# Altium PCB door_connect_2.0.PcbDoc
Units mm, origin at the board's own origin, x right, y up, seen from the top; angles counter-clockwise.
Board outline 40 x 48 mm, 2 copper layers (Top Layer, Bottom Layer); 2 components, 8 nets, 36 pads, 0 vias.
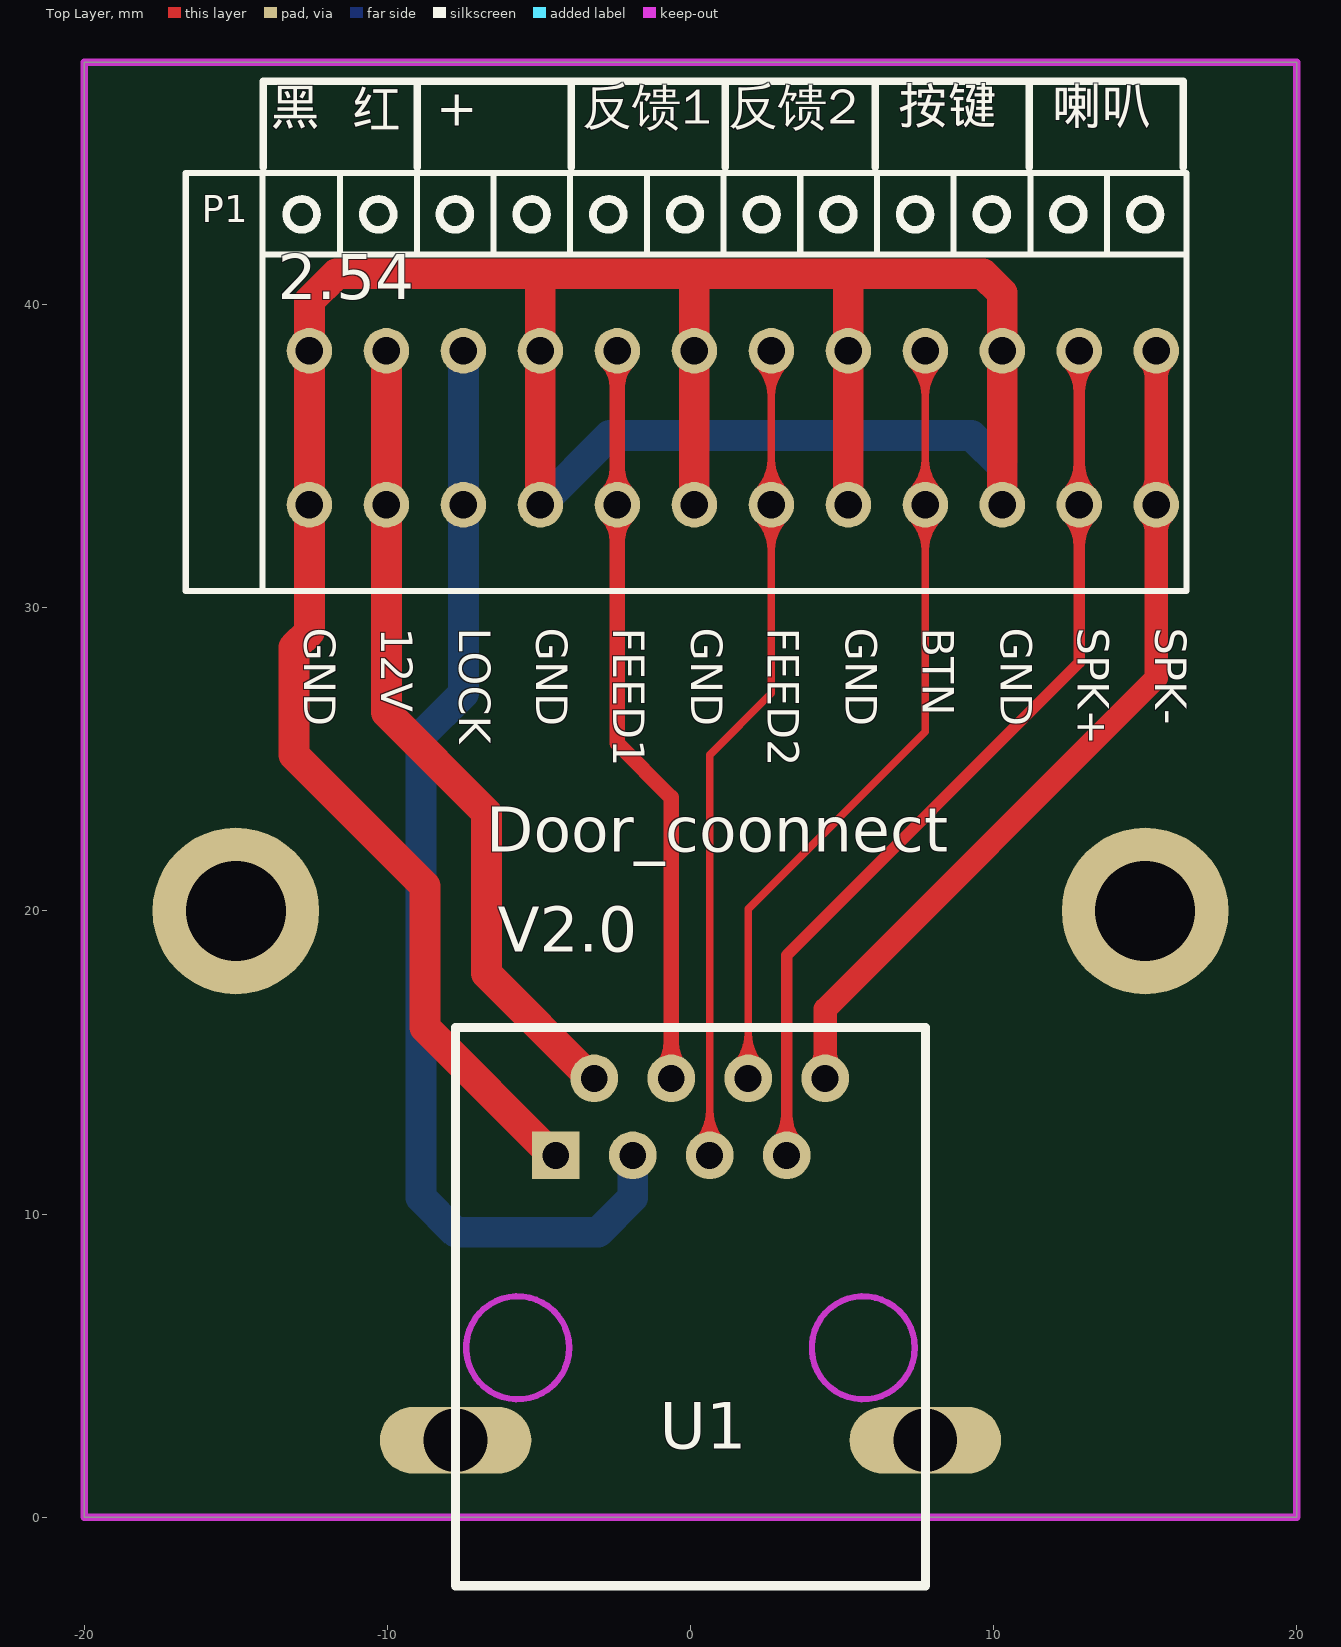
[diagram p0: Top Layer view]
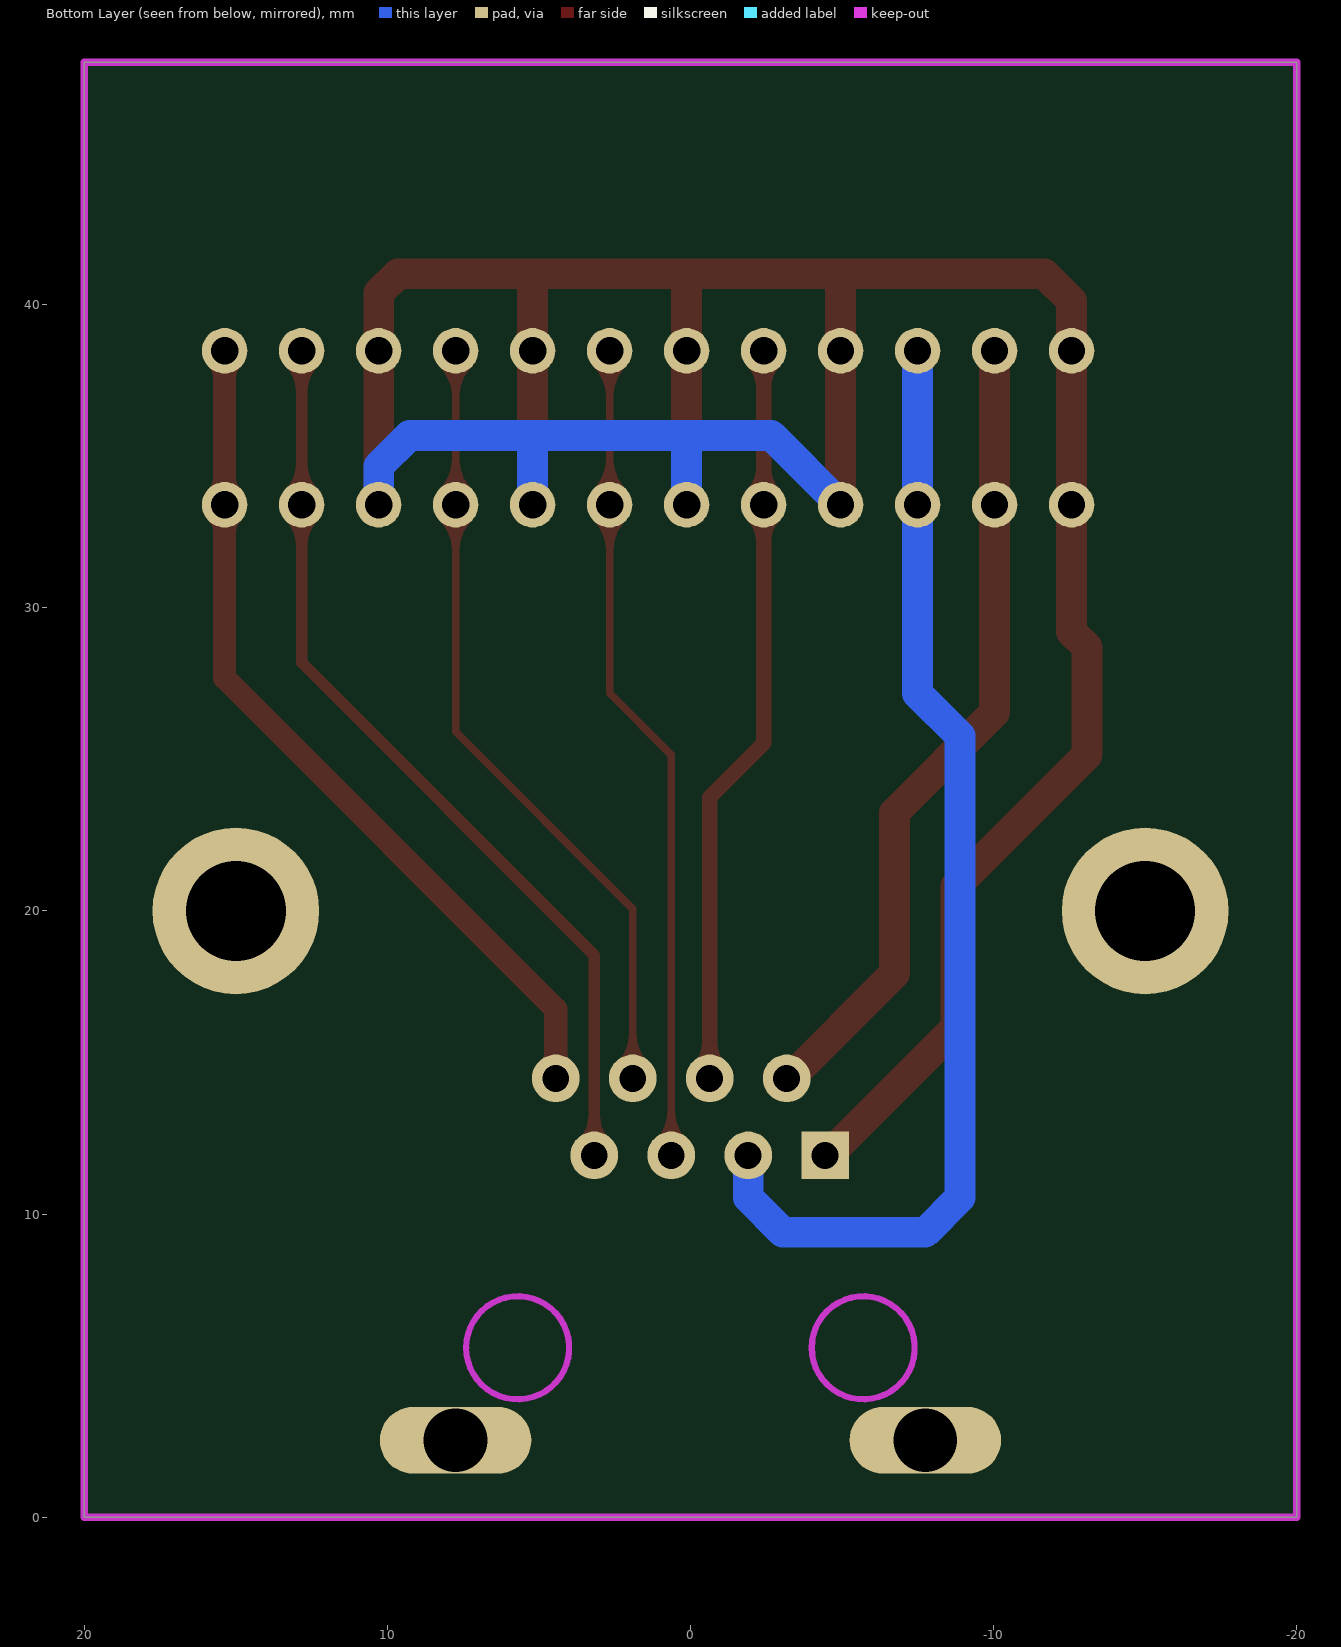
[diagram p1: Bottom Layer view, seen from below]

## Layer stack, top to bottom
Top Layer: signal copper 0.0356
Dielectric: dielectric 0.32, FR-4, Dk 4.8
Bottom Layer: signal copper 0.0356

## Board outline
-20,0 20,0 20,48 -20,48

## Design rules (kind name [scope] priority, off if disabled: settings)
Clearance [All] p1: gap=0.178
ComponentClearance [All] p1: gap=0 collisioncheckmode=3 verticalgap=0 showdistances=FALSE
HoleSize [All] p1: absolutevalues=TRUE maxlimit=25.4 minlimit=0.025 maxpercent=80.000 minpercent=20.000
HoleToHoleClearance [All] p1: gap=0.178 allowstackedmicrovias=TRUE
MinimumSolderMaskSliver [All] p1: minsoldermaskwidth=0
PolygonConnect [All] p1: connectstyle=Relief reliefconductorwidth=0.254 reliefentries=4 polygonreliefangle="90 Angle"
RoomDefinition IO [InComponentClass('IO')] p1: confinementstyle=ConfineIn formatcopy=TRUE lockcomponents=FALSE outline -89.808,-58.012 -39.008,-58.012 -39.008,-32.612 -89.808,-32.612
RoutingVias [All] p1: holewidth=0.356 width=0.559 viastyle="Through Hole" minholewidth=0.356 minwidth=0.559 maxholewidth=7.112 maxwidth=12.7
SilkToSilkClearance [All] p1: silktosilkclearance=0
SilkscreenOverComponentPads [All] p1: minsilkscreentomaskgap=0
SolderMaskExpansion [All] p1: expansion=0.102
TestPointUsage [All] p1: valid=0 allowmultiple=FALSE
Testpoint [All] p1: side=15 testpointundercomponent=TRUE minsize=1.016 maxsize=2.54 preferedsize=1.524 minholesize=0 maxholesize=1.016 preferedholesize=0.813 testpointgrid=0.025 style=1023 order=0123456789
Width [All] p1: maxlimit=2.54 minlimit=0.178 preferedwidth=0.178
18 further rules are at their usual default settings.

## Components (designator, comment, footprint, x,y, rotation, side; value= is the part's Value field where it differs from the comment)
P1 "Header 12" KF141R-2.54-12 -12.573,38.481 r0 top
U1 "RJ45-DTE" RJ45 0,5.588 r180 top

## Footprints (in the part's own frame and the unit in brackets; to place one, negate y for a bottom-side part, rotate by r counter-clockwise, add the part's x,y. Pads: shape width x height; smd on the part's side, far side on the other; paste and mask are expansions set on the pad)
KF141R-2.54-12 [mm]
  round 1.5 hole 0.9: 1(0,-5.08) 1(0,0) 2(2.54,-5.08) 2(2.54,0) 3(5.08,-5.08) 3(5.08,0) 4(7.62,-5.08) 4(7.62,0) 5(10.16,-5.08) 5(10.16,0) 6(12.7,-5.08) 6(12.7,0) 7(15.24,-5.08) 7(15.24,0) 8(17.78,-5.08) 8(17.78,0) 9(20.32,-5.08) 9(20.32,0) 10(22.86,-5.08) 10(22.86,0) 11(25.4,-5.08) 11(25.4,0) 12(27.94,-5.08) 12(27.94,0)
  silkscreen extent -4.08,-7.93 28.94,5.87
RJ45 [mil]
  oval 196.85x86.61 hole 82.68: 0(-305.12,120.08) 0(305.12,120.08)
  rect 62x62 hole 35: 1(175,-250)
  round 62 hole 35: 2(125,-350) 3(75,-250) 4(25,-350) 5(-25,-250) 6(-75,-350) 7(-125,-250) 8(-175,-350)
  Keep-Out Layer circle w8: c-224.41,0 r66.93
  Keep-Out Layer circle w8: c224.41,0 r66.93
  silkscreen extent -305,-416 305,309

## Part data
P1: "Header, 12-Pin"

## Free pads (board coordinates)
  round 5.5 hole 3.3: 0(-15,20) 0(15,20)

## Nets (pads, with @x,y where several pads share a name; then routed paths per layer and width w, separated by ;. In a path a pad name is that pad's centre, name@x,y a point inside that pad or via, vN(x,y) a via of type N, cw(c..) or ccw(c..) an arc to the next point about the centre after c; other vN are vias at no path point)
BTN: P1.9 U1.6 | length 41.9
  Top Layer w0.254: U1.6@1.438,14.845 ccw(c0.311,15.972) 1.905,15.972 ccw(c3.499,15.972) U1.6@2.372,14.845 ; U1.6@1.618,14.665 ccw(c0.924,15.359) 1.905,15.359 ccw(c2.886,15.359) U1.6@2.192,14.665 ; U1.6@1.905,14.378 1.905,20.066 7.747,25.908 7.747,33.401 P1.9@7.747,38.481 ; P1.9@7.306,32.96 cw(c6.243,31.897) 7.747,31.897 cw(c9.251,31.897) P1.9@8.188,32.96 ; P1.9@7.306,33.842 ccw(c6.243,34.905) 7.747,34.905 ccw(c9.251,34.905) P1.9@8.188,33.842 ; P1.9@7.306,38.04 cw(c6.243,36.977) 7.747,36.977 cw(c9.251,36.977) P1.9@8.188,38.04 ; P1.9@7.486,33.14 cw(c6.856,32.51) 7.747,32.51 cw(c8.638,32.51) P1.9@8.008,33.14 ; P1.9@7.486,33.662 ccw(c6.856,34.292) 7.747,34.292 ccw(c8.638,34.292) P1.9@8.008,33.662 ; P1.9@7.486,38.22 cw(c6.856,37.59) 7.747,37.59 cw(c8.638,37.59) P1.9@8.008,38.22
D12V: P1.2 U1.2 | length 26.9
  Top Layer w1.016: P1.2@-10.033,38.481 -10.033,33.401 -10.033,26.543 -6.731,23.241 -6.731,17.934 U1.2@-3.175,14.378
FEED1: P1.5 U1.4 | length 32.5
  Top Layer w0.508: P1.5@-2.764,33.05 cw(c-3.61,32.204) -2.413,32.204 cw(c-1.216,32.204) P1.5@-2.062,33.05 ; P1.5@-2.764,33.752 ccw(c-3.61,34.598) -2.413,34.598 ccw(c-1.216,34.598) P1.5@-2.062,33.752 ; P1.5@-2.764,38.13 cw(c-3.61,37.284) -2.413,37.284 cw(c-1.216,37.284) P1.5@-2.062,38.13 ; P1.5@-2.413,38.481 -2.413,33.401 -2.413,25.527 -0.635,23.749 U1.4@-0.635,14.378 ; U1.4@-1.012,14.755 ccw(c-1.923,15.666) -0.635,15.666 ccw(c0.653,15.666) U1.4@-0.258,14.755
FEED2: P1.7 U1.5 | length 42.8
  Top Layer w0.254: U1.5@0.168,12.305 ccw(c-0.959,13.432) 0.635,13.432 ccw(c2.229,13.432) U1.5@1.102,12.305 ; U1.5@0.348,12.125 ccw(c-0.346,12.819) 0.635,12.819 ccw(c1.616,12.819) U1.5@0.922,12.125 ; U1.5@0.635,11.838 0.635,25.146 2.667,27.178 2.667,33.401 P1.7@2.667,38.481 ; P1.7@2.226,32.96 cw(c1.163,31.897) 2.667,31.897 cw(c4.171,31.897) P1.7@3.108,32.96 ; P1.7@2.226,33.842 ccw(c1.163,34.905) 2.667,34.905 ccw(c4.171,34.905) P1.7@3.108,33.842 ; P1.7@2.226,38.04 cw(c1.163,36.977) 2.667,36.977 cw(c4.171,36.977) P1.7@3.108,38.04 ; P1.7@2.406,33.14 cw(c1.776,32.51) 2.667,32.51 cw(c3.558,32.51) P1.7@2.928,33.14 ; P1.7@2.406,33.662 ccw(c1.776,34.292) 2.667,34.292 ccw(c3.558,34.292) P1.7@2.928,33.662 ; P1.7@2.406,38.22 cw(c1.776,37.59) 2.667,37.59 cw(c3.558,37.59) P1.7@2.928,38.22
GND: P1.1 P1.4 P1.6 P1.8 P1.10 U1.1 | length 106.7
  Top Layer w1.016: P1.4@-4.953,33.401 -4.953,38.481 -4.953,40.64 ; U1.1@-4.445,11.838 -8.763,16.156 -8.763,20.828 -13.081,25.146 -13.081,28.702 -12.573,29.21 -12.573,33.401 -12.573,38.481 -12.573,40.132 -11.684,41.021 9.652,41.021 10.287,40.386 10.287,38.481 P1.10@10.287,33.401 ; P1.6@0.127,33.401 0.127,38.481 0.127,40.894 ; P1.8@5.207,33.401 5.207,38.481 5.207,40.894
  Bottom Layer w1.016: P1.4@-4.953,33.401 -2.667,35.687 9.271,35.687 10.287,34.671 P1.10@10.287,33.401 ; P1.6@0.127,33.401 0.127,35.56 ; P1.8@5.207,33.401 5.207,35.306
LOCK_V+: P1.3 U1.3 | length 37.7
  Bottom Layer w1.016: P1.3@-7.493,38.481 -7.493,33.401 -7.493,27.178 -8.89,25.781 -8.89,10.541 -7.747,9.398 -3.048,9.398 -1.905,10.541 U1.3@-1.905,11.838
SPEAKERA: P1.11 U1.7 | length 39.3
  Top Layer w0.381: U1.7@2.753,12.26 ccw(c1.734,13.279) 3.175,13.279 ccw(c4.616,13.279) U1.7@3.597,12.26 ; U1.7@3.175,11.838 3.175,18.542 12.827,28.194 12.827,33.401 P1.11@12.827,38.481 ; P1.11@12.431,33.005 cw(c11.476,32.05) 12.827,32.05 cw(c14.178,32.05) P1.11@13.223,33.005 ; P1.11@12.431,33.797 ccw(c11.476,34.752) 12.827,34.752 ccw(c14.178,34.752) P1.11@13.223,33.797 ; P1.11@12.431,38.085 cw(c11.476,37.13) 12.827,37.13 cw(c14.178,37.13) P1.11@13.223,38.085
SPEAKERB: P1.12 U1.8 | length 34.4
  Top Layer w0.762: U1.8@4.158,14.665 ccw(c3.464,15.359) 4.445,15.359 ccw(c5.426,15.359) U1.8@4.732,14.665 ; U1.8@4.445,14.378 4.445,16.764 15.367,27.686 15.367,33.401 P1.12@15.367,38.481 ; P1.12@15.106,33.14 cw(c14.476,32.51) 15.367,32.51 cw(c16.258,32.51) P1.12@15.628,33.14 ; P1.12@15.106,33.662 ccw(c14.476,34.292) 15.367,34.292 ccw(c16.258,34.292) P1.12@15.628,33.662 ; P1.12@15.106,38.22 cw(c14.476,37.59) 15.367,37.59 cw(c16.258,37.59) P1.12@15.628,38.22
pads on no net: U1.0

## Keep-outs
Keep-Out Layer:
  the board outline again, w0.254

## Silkscreen, mask and mechanical layers (free items; w line width, h text height)
Top Overlay:
  lines w0.254: -14.097,44.54 -14.097,47.371 -9.017,47.371 ; -9.017,44.54 -9.017,47.371 ; -3.937,44.54 -3.937,47.371 ; 1.143,44.54 1.143,47.371 ; 6.096,44.54 6.096,47.371 ; 11.176,44.54 11.176,47.371 ; 16.256,44.54 16.256,47.371 11.176,47.371 ; -9.017,47.371 -3.937,47.371 ; -3.937,47.371 1.143,47.371 ; 1.143,47.371 6.096,47.371 ; 6.096,47.371 11.176,47.371
  text "按键" at 6.858,45.593 h2.03
  text "反馈1" at -3.556,45.579 h2.03
  text "反馈2" at 1.27,45.579 h2.03
  text "喇叭" at 11.938,45.579 h2.03
  text "黑" at -13.843,45.543 h2.03
  text "+" at -8.382,45.506 h2.03
  text "红" at -11.176,45.48 h2.03
  text "GND" at -13.081,29.337 h1.78 r270
  text "12V" at -10.549,29.337 h1.78 r270
  text "LOCK" at -7.978,29.337 h1.78 r270
  text "GND" at -5.426,29.337 h1.78 r270
  text "FEED1" at -2.894,29.337 h1.78 r270
  text "GND" at -0.323,29.337 h1.78 r270
  text "FEED2" at 2.209,29.337 h1.78 r270
  text "GND" at 4.78,29.337 h1.78 r270
  text "BTN" at 7.312,29.337 h1.78 r270
  text "GND" at 9.883,29.337 h1.78 r270
  text "SPK+" at 12.434,29.337 h1.78 r270
  text "SPK-" at 14.986,29.337 h1.78 r270
  text "Door_coonnect" at -6.731,21.463 h2.54
  text "V2.0" at -6.35,18.161 h2.54

## Text inside footprints (layer, text, board x,y; h text height)
P1: Top Overlay "2.54" at -13.623,39.681 h2.54